# Altium PCB 42CAN.PcbDoc (part 1 of 2)
Units mm, origin at the board's own origin, x right, y up, seen from the top; angles counter-clockwise.
Board outline 42 x 42 mm, 4 copper layers (Top Layer 1 2, GND, Bottom Layer, POWER), stack 0.746 mm thick; 118 components, 90 nets, 420 pads, 193 vias.
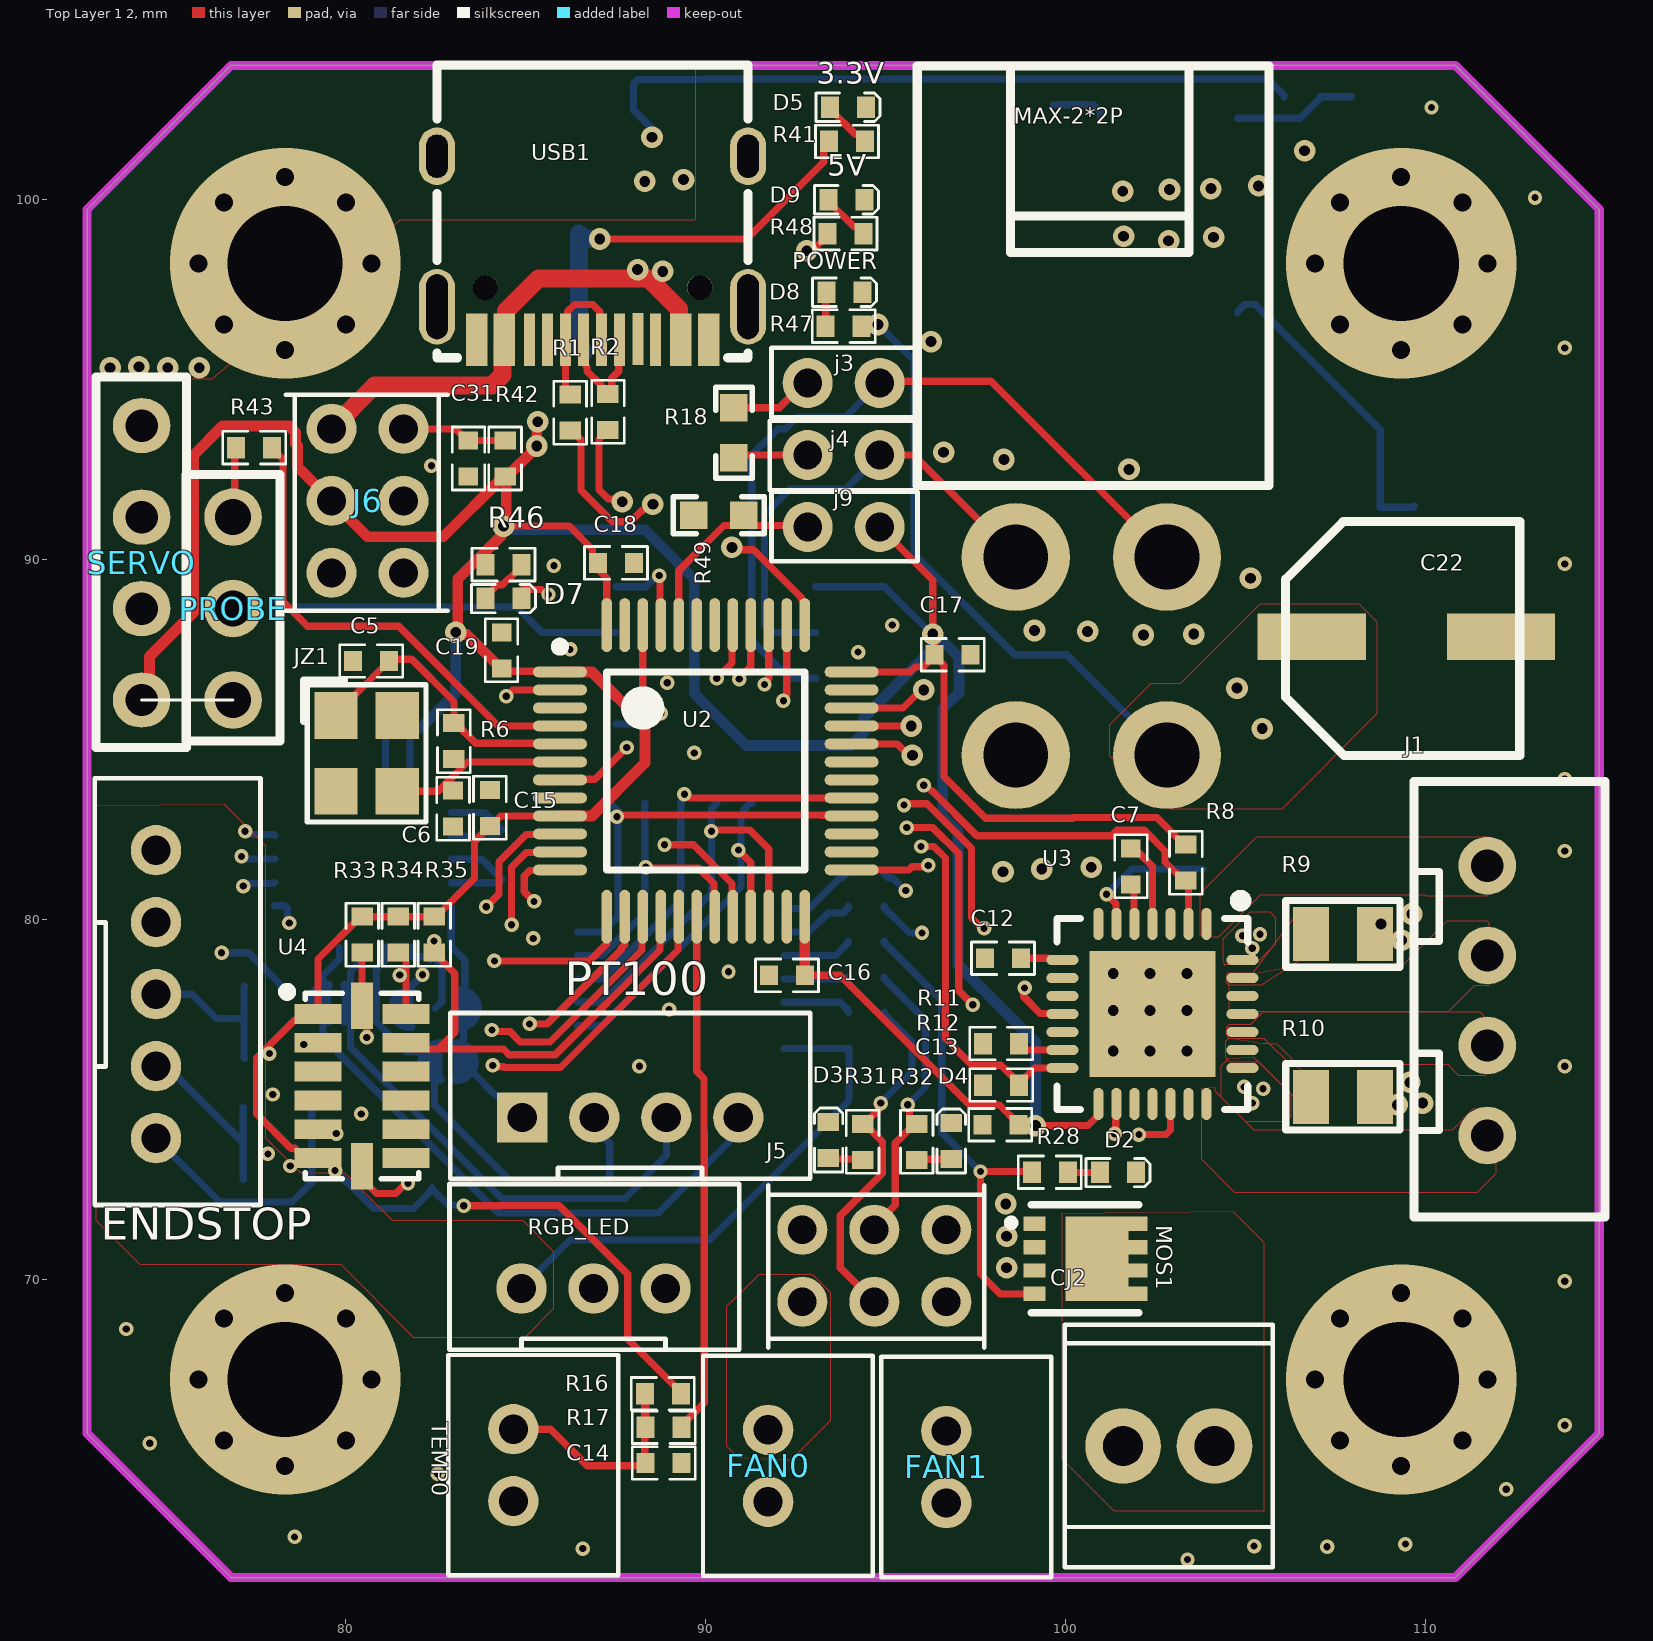
[diagram p0: Top Layer 1 2 view]
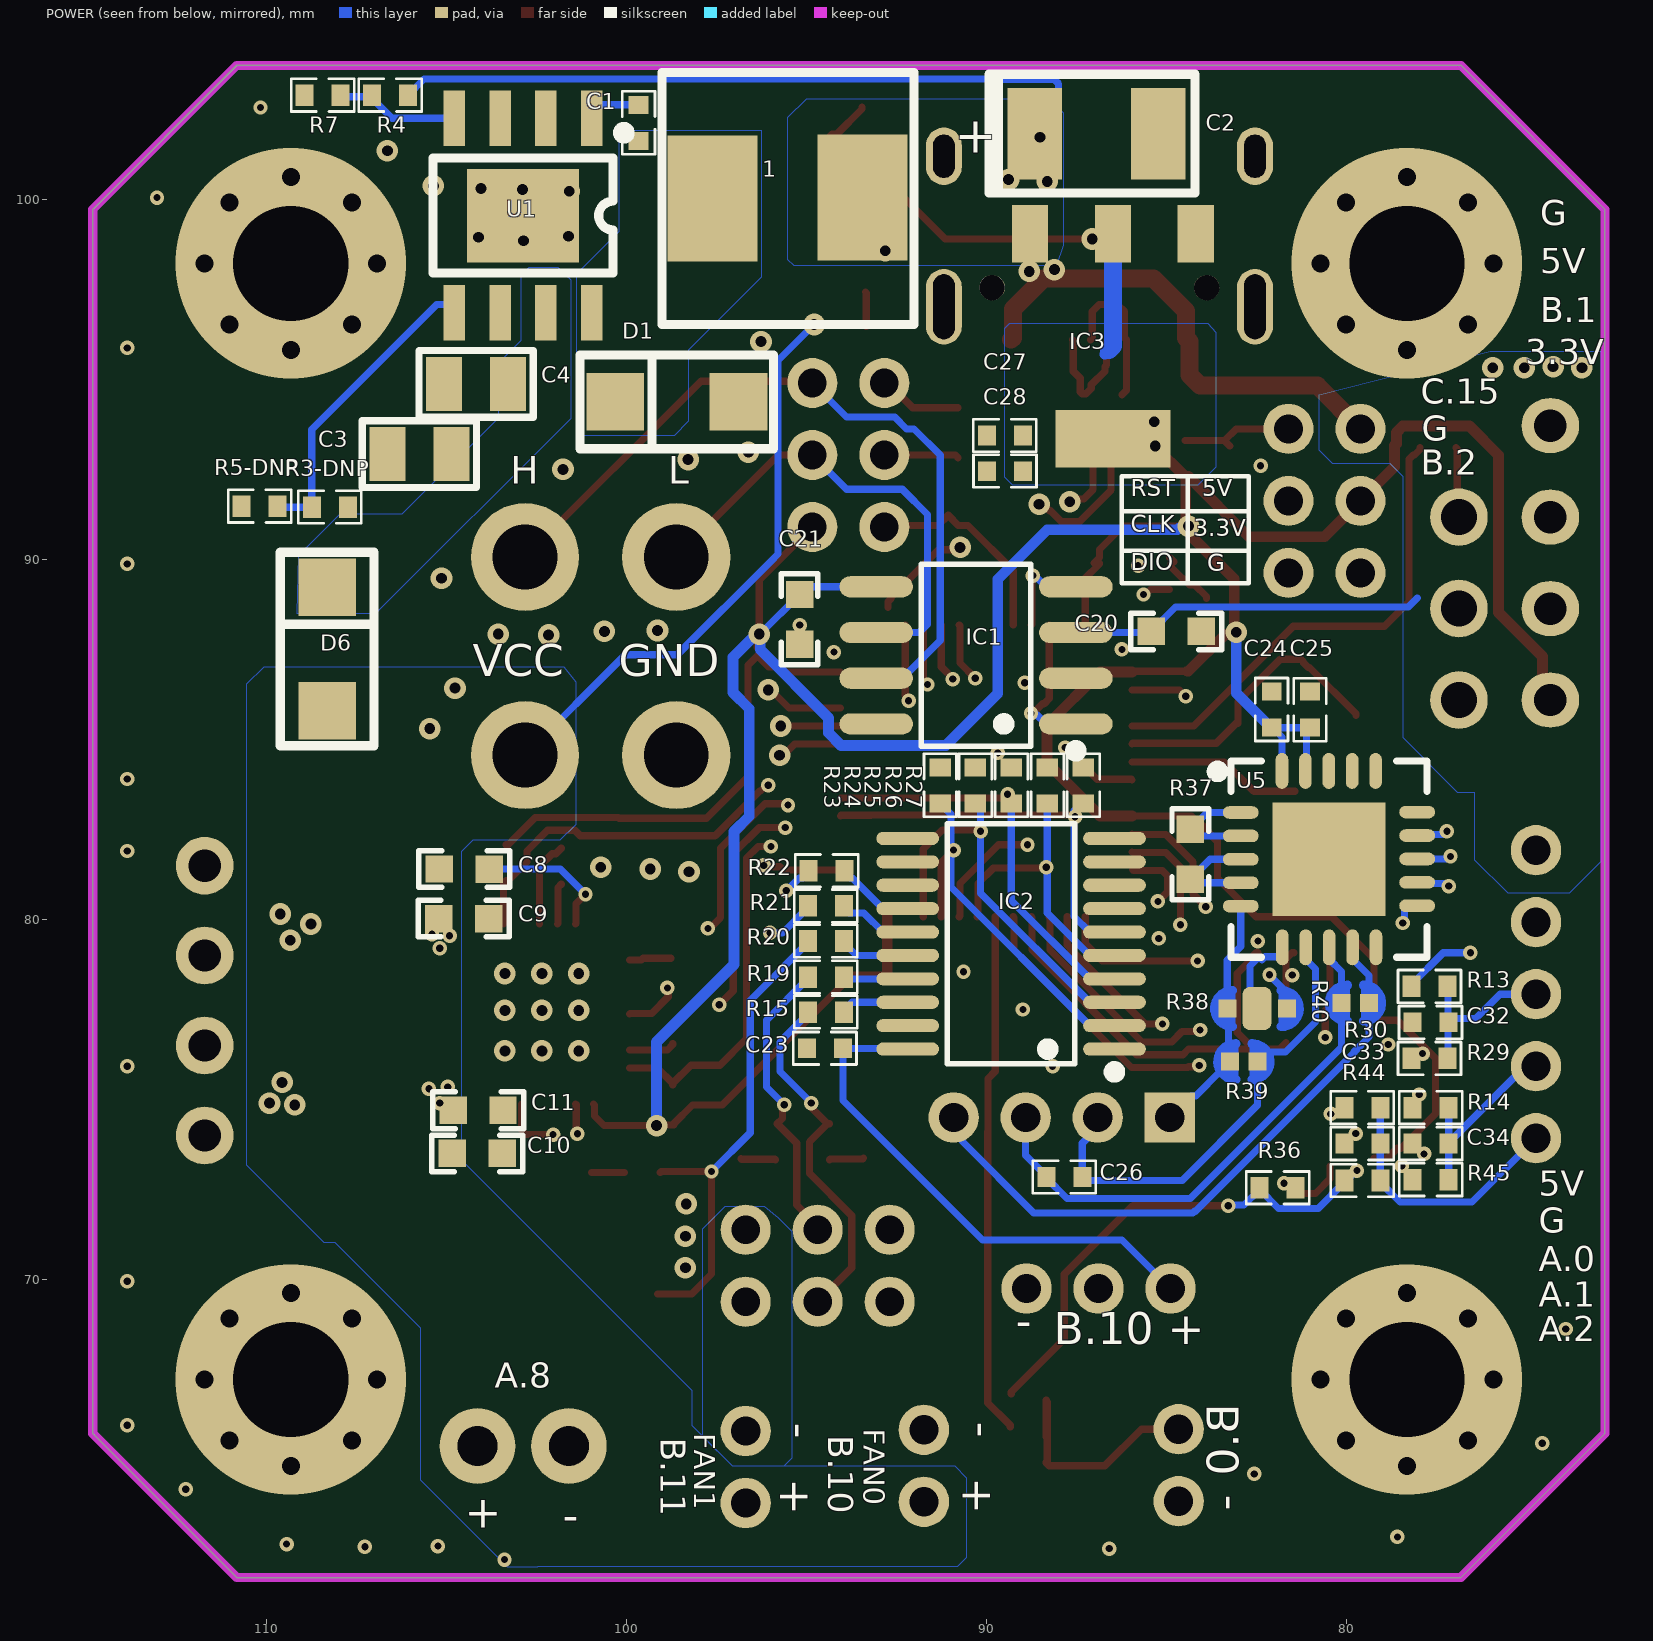
[diagram p1: POWER view, seen from below]
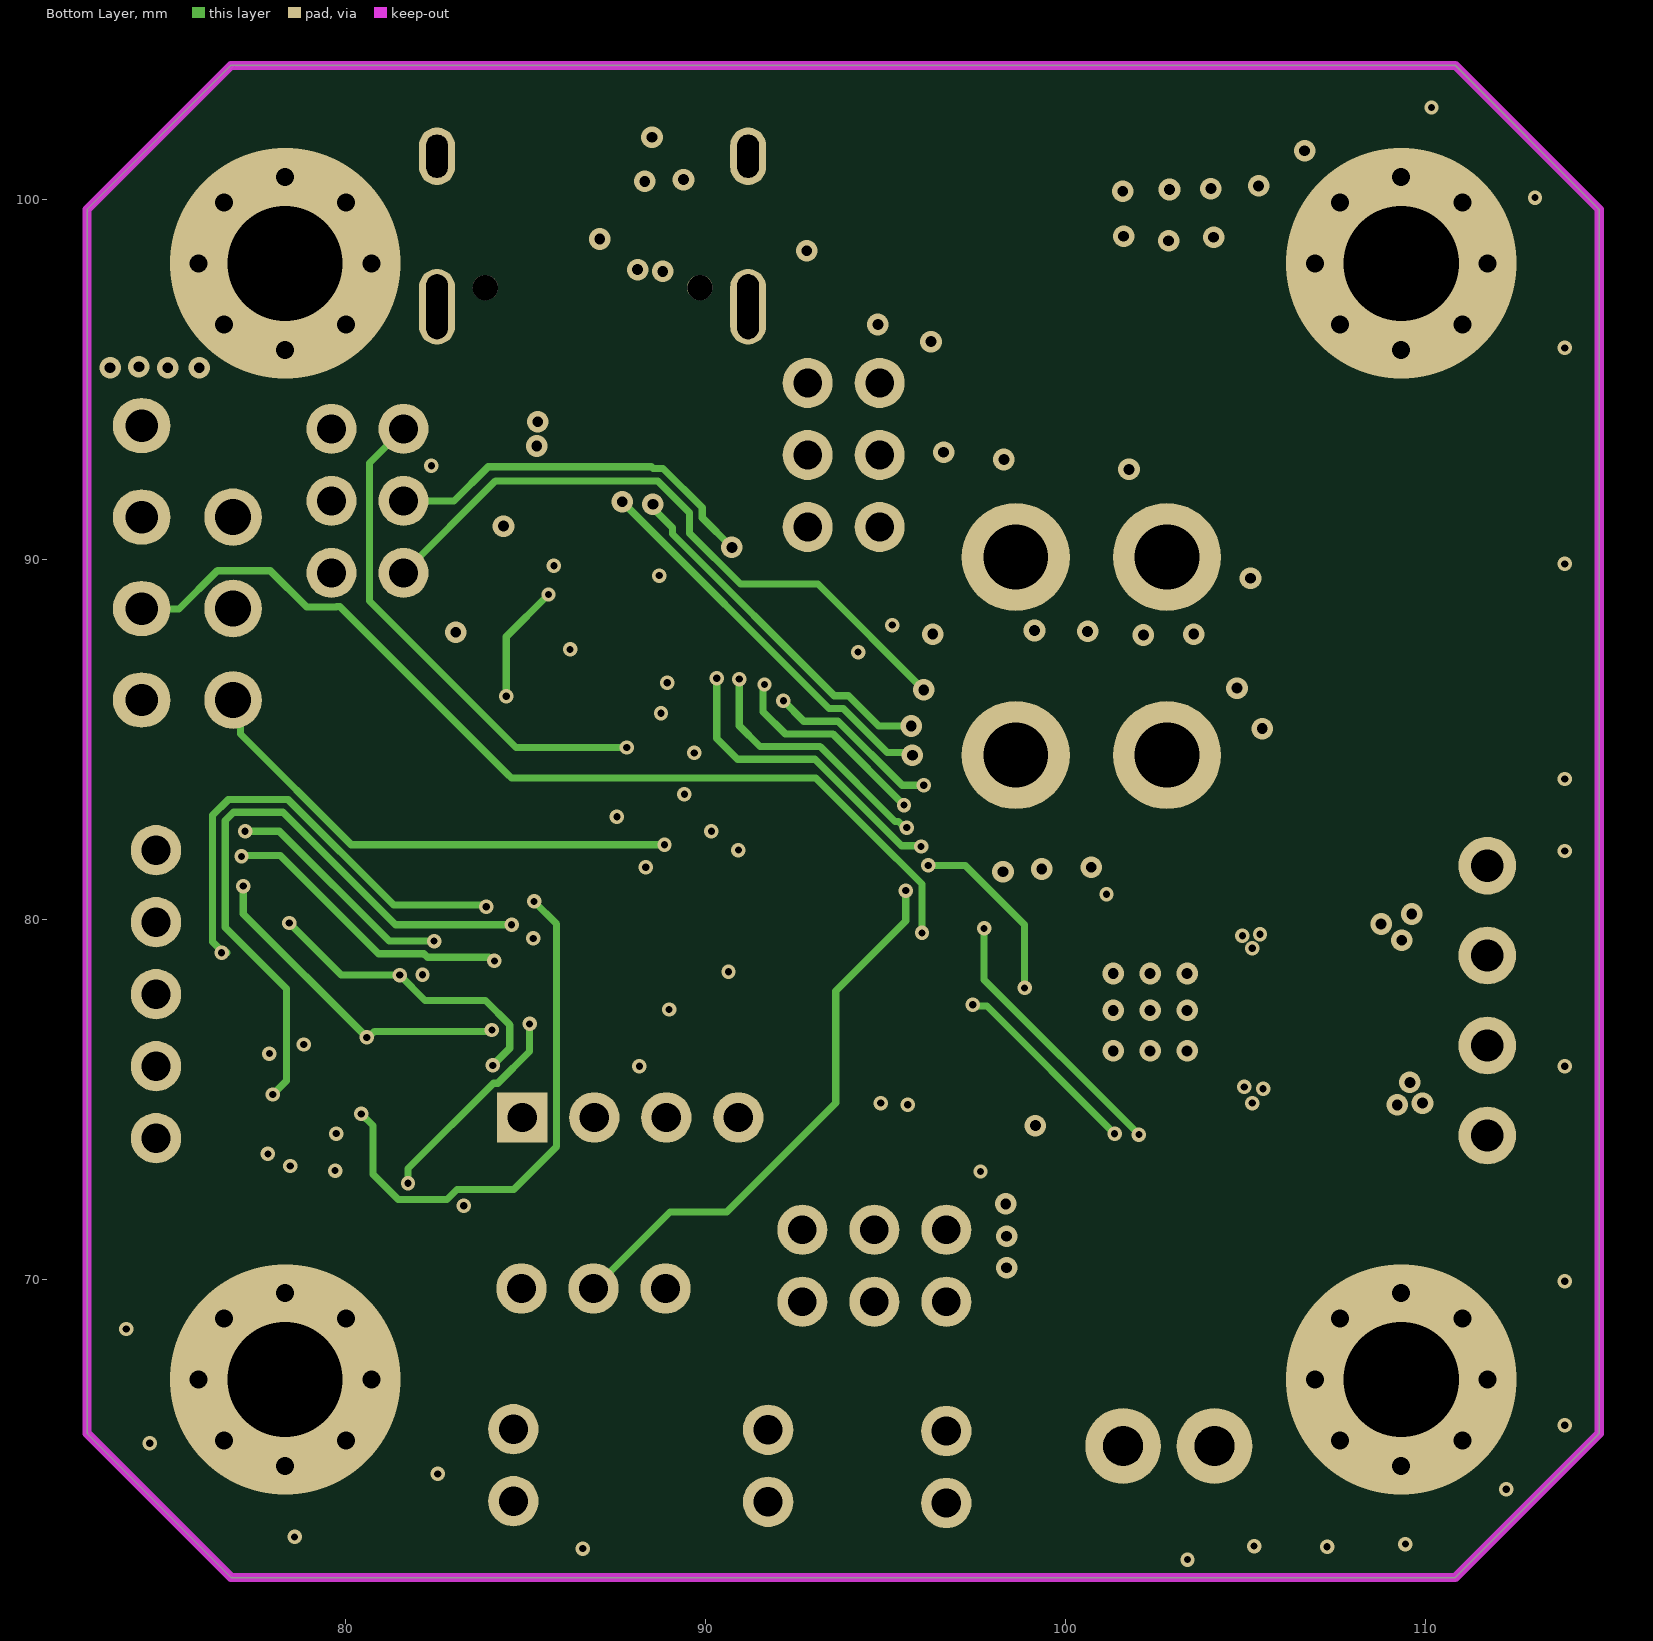
[diagram p2: Bottom Layer]

## Layer stack, top to bottom
Top Solder: solder mask 0.0102, Solder Resist, Dk 3.5
Top Layer 1 2: signal copper 0.035
Dielectric 4: prepreg 0.0711, PP-006, Dk 4.1
Dielectric 2: prepreg 0.0711, PP-006, Dk 4.1
GND: signal copper 0.0356
Dielectric 1: dielectric 0.32, FR-4, Dk 4.8
Bottom Layer: signal copper 0.0356
Dielectric 3: prepreg 0.0711, PP-006, Dk 4.1
Dielectric 5: prepreg 0.0711, PP-006, Dk 4.1
POWER: signal copper 0.035
Bottom Solder: solder mask 0.0102, Solder Resist, Dk 3.5

## Board outline
72.835,65.722 72.835,99.722 76.835,103.722 110.835,103.722 114.835,99.722 114.835,65.722 110.835,61.722 76.835,61.722

## Design rules (kind name [scope] priority, off if disabled: settings)
AssemblyTestPointUsage [All] p0: scope1count=1 scope1_0_kind=Board scope1_0_value=Board scope2count=1 scope2_0_kind=Board scope2_0_value=Board commentlength=0
AssemblyTestpoint [All] p0: scope1count=1 scope1_0_kind=Board scope1_0_value=Board scope2count=1 scope2_0_kind=Board scope2_0_value=Board commentlength=0
Clearance [All] p0: scope1count=1 scope1_0_kind=Board scope1_0_value=Board scope2count=1 scope2_0_kind=Board scope2_0_value=Board commentlength=0 gap=0.152
Clearance [All] p1: gap=0.152 ignorepadtopadclearanceinfootprint=TRUE
ComponentClearance [All] p0: scope1count=1 scope1_0_kind=Board scope1_0_value=Board scope2count=1 scope2_0_kind=Board scope2_0_value=Board commentlength=0 gap=0.254 collisioncheckmode=3
DiffPairsRouting [All] p0: scope1count=1 scope1_0_kind=Board scope1_0_value=Board scope2count=1 scope2_0_kind=Board scope2_0_value=Board commentlength=0
FabricationTestPointUsage [All] p0: scope1count=1 scope1_0_kind=Board scope1_0_value=Board scope2count=1 scope2_0_kind=Board scope2_0_value=Board commentlength=0 valid=0 allowmultiple=FALSE
FabricationTestpoint [All] p0: scope1count=1 scope1_0_kind=Board scope1_0_value=Board scope2count=1 scope2_0_kind=Board scope2_0_value=Board commentlength=0 side=3 testpointundercomponent=TRUE minsize=1.016 maxsize=2.54 preferedsize=1.524 minholesize=0 maxholesize=1.016 preferedholesize=0.813 testpointgrid=0.025
FanoutControl Fanout_BGA [All] p0 off: scope1count=1 scope1_0_kind=Board scope1_0_value=Board scope2count=1 scope2_0_kind=Board scope2_0_value=Board commentlength=69 // Protel DXP Scope 1 Expression Was: IsBGA   Fanout_BGA (Default Rule)
FanoutControl Fanout_LCC [All] p0 off: scope1count=1 scope1_0_kind=Board scope1_0_value=Board scope2count=1 scope2_0_kind=Board scope2_0_value=Board commentlength=69 // Protel DXP Scope 1 Expression Was: IsLCC   Fanout_LCC (Default Rule)
FanoutControl Fanout_SOIC [All] p0 off: scope1count=1 scope1_0_kind=Board scope1_0_value=Board scope2count=1 scope2_0_kind=Board scope2_0_value=Board commentlength=71 // Protel DXP Scope 1 Expression Was: IsSOIC   Fanout_SOIC (Default Rule)
FanoutControl Fanout_Small [All] p0 off: scope1count=1 scope1_0_kind=Board scope1_0_value=Board scope2count=1 scope2_0_kind=Board scope2_0_value=Board commentlength=84 // Protel DXP Scope 1 Expression Was: (CompPinCount < 5)   Fanout_Small (Default Rule)
FanoutControl Fanout_Default [All] p0: scope1count=1 scope1_0_kind=Board scope1_0_value=Board scope2count=1 scope2_0_kind=Board scope2_0_value=Board commentlength=30 // Fanout_Default (Default Rule)
Height [All] p0: scope1count=1 scope1_0_kind=Board scope1_0_value=Board scope2count=1 scope2_0_kind=Board scope2_0_value=Board commentlength=0
HoleSize [All] p0: scope1count=1 scope1_0_kind=Board scope1_0_value=Board scope2count=1 scope2_0_kind=Board scope2_0_value=Board commentlength=0 absolutevalues=TRUE maxlimit=2.54 minlimit=0.025 maxpercent=80.000 minpercent=20.000
HoleToHoleClearance [All] p0: scope1count=1 scope1_0_kind=Board scope1_0_value=Board scope2count=1 scope2_0_kind=Board scope2_0_value=Board commentlength=0
LayerPairs [All] p0: scope1count=1 scope1_0_kind=Board scope1_0_value=Board scope2count=1 scope2_0_kind=Board scope2_0_value=Board commentlength=0 enforce=TRUE
MinimumSolderMaskSliver [All] p0: scope1count=1 scope1_0_kind=Board scope1_0_value=Board scope2count=1 scope2_0_kind=Board scope2_0_value=Board commentlength=0
NetAntennae [All] p0: scope1count=1 scope1_0_kind=Board scope1_0_value=Board scope2count=1 scope2_0_kind=Board scope2_0_value=Board commentlength=0
PasteMaskExpansion [All] p0: scope1count=1 scope1_0_kind=Board scope1_0_value=Board scope2count=1 scope2_0_kind=Board scope2_0_value=Board commentlength=0 expansion=0
PlaneClearance [All] p0: scope1count=1 scope1_0_kind=Board scope1_0_value=Board scope2count=1 scope2_0_kind=Board scope2_0_value=Board commentlength=0 clearance=0.508
PlaneConnect [All] p0: scope1count=1 scope1_0_kind=Board scope1_0_value=Board scope2count=1 scope2_0_kind=Board scope2_0_value=Board commentlength=0 planeconnectstyle=Relief reliefexpansion=0.508 reliefentries=4 reliefconductorwidth=0.254 reliefairgap=0.254
PolygonConnect [All] p0: scope1count=1 scope1_0_kind=Board scope1_0_value=Board scope2count=1 scope2_0_kind=Board scope2_0_value=Board commentlength=0 connectstyle=Direct reliefconductorwidth=0.254 reliefentries=4 polygonreliefangle="90 Angle"
PolygonConnect [All] p1: connectstyle=Direct reliefconductorwidth=0.254 reliefentries=4 polygonreliefangle="90 Angle" airgapwidth=0.254
RoomDefinition 42CAN [All] p0: scope1count=1 scope1_0_kind=ComponentClass scope1_0_value=42CAN scope2count=1 scope2_0_kind=Board scope2_0_value=Board commentlength=0 region_x1=0 region_y1=0 region_x2=20000000 region_y2=10000000 confinementstyle=ConfineIn
RoomDefinition 42CAN [InComponentClass('42CAN')] p1: confinementstyle=ConfineIn formatcopy=TRUE lockcomponents=FALSE outline 0,0 50.8,0 50.8,25.4 0,25.4
RoutingCorners [All] p0: scope1count=1 scope1_0_kind=Board scope1_0_value=Board scope2count=1 scope2_0_kind=Board scope2_0_value=Board commentlength=0 cornerstyle=45-Degree minsetback=2.54 maxsetback=2.54
RoutingLayers [All] p0: scope1count=1 scope1_0_kind=Board scope1_0_value=Board scope2count=1 scope2_0_kind=Board scope2_0_value=Board commentlength=0 top layer=Automatic mid layer 1=Automatic mid layer 2=Automatic bottom layer=Automatic
RoutingPriority [All] p0: scope1count=1 scope1_0_kind=Board scope1_0_value=Board scope2count=1 scope2_0_kind=Board scope2_0_value=Board commentlength=0
RoutingTopology [All] p0: scope1count=1 scope1_0_kind=Board scope1_0_value=Board scope2count=1 scope2_0_kind=Board scope2_0_value=Board commentlength=0 topology=Shortest
RoutingVias [All] p0: scope1count=1 scope1_0_kind=Board scope1_0_value=Board scope2count=1 scope2_0_kind=Board scope2_0_value=Board commentlength=0 holewidth=0.711 width=1.27 viastyle="Through Hole" minholewidth=0.711 minwidth=1.27 maxholewidth=0.711 maxwidth=1.27
RoutingVias [All] p1: holewidth=0.711 width=1.27 viastyle="Through Hole" minholewidth=0.711 minwidth=1.27 maxholewidth=0.711 maxwidth=1.27
ShortCircuit [All] p0: scope1count=1 scope1_0_kind=Board scope1_0_value=Board scope2count=1 scope2_0_kind=Board scope2_0_value=Board commentlength=0 allowed=FALSE
SilkToBoardRegionClearance [All] p0: scope1count=1 scope1_0_kind=Board scope1_0_value=Board scope2count=1 scope2_0_kind=Board scope2_0_value=Board commentlength=0
SilkToSilkClearance [All] p0: scope1count=1 scope1_0_kind=Board scope1_0_value=Board scope2count=1 scope2_0_kind=Board scope2_0_value=Board commentlength=0
SilkToSolderMaskClearance [All] p0 off: scope1count=1 scope1_0_kind=Board scope1_0_value=Board scope2count=1 scope2_0_kind=Board scope2_0_value=Board commentlength=44 // Protel DXP Scope 1 Expression Was: IsPad
SolderMaskExpansion [All] p0: scope1count=1 scope1_0_kind=Board scope1_0_value=Board scope2count=1 scope2_0_kind=Board scope2_0_value=Board commentlength=0 expansion=0.102
SolderMaskExpansion [All] p1: expansion=0.102 istentingtop=FALSE
UnRoutedNet [All] p0: scope1count=1 scope1_0_kind=Board scope1_0_value=Board scope2count=1 scope2_0_kind=Board scope2_0_value=Board commentlength=0
UnpouredPolygon [All] p0: scope1count=1 scope1_0_kind=Board scope1_0_value=Board scope2count=1 scope2_0_kind=Board scope2_0_value=Board commentlength=0
Width [All] p0: scope1count=1 scope1_0_kind=Board scope1_0_value=Board scope2count=1 scope2_0_kind=Board scope2_0_value=Board commentlength=0 maxlimit=2.54 minlimit=0.102 preferedwidth=0.2
Width [All] p1: maxlimit=2.54 minlimit=0.102 preferedwidth=0.2
30 further rules are at their usual default settings.

## Components (designator, comment, footprint, x,y, rotation, side; value= is the part's Value field where it differs from the comment)
1 "22UH" 7*7电感 92.25,103.525 r0 bottom locked
C1 "0.01UF" C0402 99.675,102.125 r90 bottom
C2 "220UF" 3528B 87.95,101.825 r180 bottom
C3 "4.7UF/50V" C0805 105.65,92.925 r0 bottom
C4 "4.7UF/50V" C0805 104.075,94.875 r0 bottom
C5 "22PF" C0402 80.725,87.175 r180 top
C6 "22PF" C0402 83,83.075 r90 top
C7 "22NF" C0402 101.825,81.475 r90 top
C8 "0.1UF/50V" 0603 103.225,81.954 r0 bottom
C9 "0.1UF/50V" 0603C 105.825,79.471 r180 bottom
C10 "0.1UF/50V" 0603C 105.45,72.949 r180 bottom
C11 "1UF/100V" 0603 102.841,75.252 r0 bottom
C12 "2.2uf" C0402 98.275,78.925 r0 top
C13 "0.1UF" C0402 98.2,74.3 r0 top
C14 "10UF" C0402 88.85,64.9 r180 top
C15 "0.1UF" C0402 84.025,83.1 r270 top
C16 "0.1UF" C0402 92.275,78.45 r0 top
C17 "0.1UF" C0402 96.875,87.35 r180 top
C18 "0.1UF" C0402 87.525,89.9 r180 top
C19 "0.1UF" C0402 84.35,87.475 r270 top
C20 "0.1UF" 0603C 86.034,87.448 r180 bottom
C21 "0.1UF" 0603C 95.754,89.625 r270 bottom
C22 "100UF/35V" 6.3*7.7电解电容 109.425,87.75 r90 top
C23 "0.1UF" C0402 94.5,76.425 r180 bottom
C24 "0.1UF" C0402 82.089,85.829 r270 bottom
C25 "0.1UF" C0402 81.025,85.825 r270 bottom
C26 "0.1UF" C0402 87.85,72.85 r180 bottom
C27 "0.1UF" C0402 89.503,93.438 r0 bottom
C28 "10UF" C0402 89.5,92.45 r0 bottom
C31 "0.1UF" C0402 83.425,92.8 r90 top
C32 "10UF" C0402 77.682,77.146 r180 bottom
C33 "10UF" C0402 79.575,73.775 r180 bottom
C34 "10UF" C0402 77.675,73.775 r180 bottom
CJ2 "KF2.54-2P" KF2.54-2P -109.15,203.625 r0 top
D1 "SS34" SMA 92.75,97.15 r0 bottom
D2 "LED 蓝色" 0402LED 101.472,72.983 r0 top
D3 "LED 蓝色" 0402LED 93.417,73.872 r90 top
D4 "LED 蓝色" 0402LED 96.825,73.85 r90 top
D5 "LED 蓝色" 0402led 93.966,102.568 r0 top
D6 "SS34" SMA 105.55,81.65 r90 bottom
D7 "LED 蓝色" 0402led 84.4,88.925 r0 top
D8 "LED 蓝色" 0402led 93.872,97.433 r0 top
D9 "LED 蓝色" 0402led 93.925,100 r0 top
ENDSTOP "PH2.0-5P" PH2.0-5P 72.769,82.687 r270 top
FAN0 "PH2.0-2P" PH2.0-2P 91.774,64.982 r270 top
FAN1 "PH2.0-2P" PH2.0-2P 96.725,64.95 r270 top
IC1 "MCP2542" SOIC-8 90.302,87.335 r90 bottom
IC2 "74HC541" TSSOP-20 86.452,75.78 r90 bottom
IC3 "AMS1117-3.3V" AMS1117 85.2,93.65 r0 bottom
J1 "XH2.54-4" XH2.54-4 109.693,71.46 r90 top
j3 "2.0-1*2" "2.0MM-1*2P -插针" 94.012,95.078 r180 top
j4 "2.0-1*2" "2.0MM-1*2P -插针" 93.688,92.722 r0 top
J5 "2*3排母-2.0-镀金" "2.0MM-2*3P 排母" 92.475,71.506 r270 top
J6 "2*3排母-2.0-镀金" "2.0MM-2*3P -插针" 81.75,93.85 r180 top
j9 "2.0-1*2" "2.0MM-1*2P -插针" 94.012,91.078 r180 top
JZ1 "8M" OSC-3225-4P 80.6,84.6 r270 top
MAX-2*2P "2*4P-2.54排针_1" MX4.2-2*2P 101.025,95.25 r180 top locked
MOS1 "HSBB6115" PRPAK3*3 98.664,71.851 r270 top
PROBE "3P" 3P 75.79,82.555 r0 top
PT100 "PH2.0-4P" PH2.0-4P 84.163,72.519 r0 top
R1 "22R" R0402 86.25,94.075 r90 top
R2 "22R" R0402 87.3,94.1 r90 top
R3-DNP "10K" R0402 108.25,91.45 r0 bottom
R4 "10K" R0402 106.575,102.89 r0 bottom
R5-DNP "3K" R0402 110.2,91.475 r0 bottom
R6 "1M" R0402 83.025,84.95 r270 top
R7 "3.24K" R0402 108.45,102.89 r0 bottom
R8 "20k" R0402 103.35,81.575 r90 top
R9 "0R11" 0805 107.6,79.6 r0 top
R10 "0R11" 0805 107.6,75.075 r0 top
R11 "20k" R0402 98.225,76.55 r180 top
R12 "20k" R0402 98.225,75.4 r180 top
R13 "1K" R0402 77.707,78.146 r180 bottom
R14 "1K" R0402 77.675,74.775 r180 bottom
R15 "1K" R0402 94.475,77.425 r0 bottom
R16 "2.2K 0.1%低温漂" R0402 88.825,66.825 r180 top
R17 "1K" R0402 88.85,65.9 r0 top
R18 "120R 0.1%" 0603 91.354,92.225 r90 top
R19 "1K" R0402 94.475,78.4 r0 bottom
R20 "1K" R0402 94.475,79.4 r0 bottom
R21 "1K" R0402 94.475,80.375 r0 bottom
R22 "22R" R0402 94.45,81.35 r0 bottom
R23 "10K" R0402 91.3,83.725 r90 bottom
R24 "10K" R0402 90.325,83.725 r90 bottom
R25 "10K" R0402 89.325,83.725 r90 bottom
R26 "10K" R0402 88.325,83.725 r90 bottom
R27 "10K" R0402 87.325,83.725 r90 bottom
R28 "1K" R0402 99.575,72.975 r180 top
R29 "2.2K" R0402 77.707,76.146 r180 bottom
R30 "1K" R0402 79.575,74.775 r180 bottom
R31 "1K" R0402 94.375,73.825 r90 top
R32 "1K" R0402 95.875,73.825 r90 top
R33 "4.7K" R0402 80.475,79.575 r90 top
R34 "4.7K" R0402 81.475,79.575 r90 top
R35 "4.7K" R0402 82.475,79.575 r90 top
R36 "10K" R0402 81.925,72.55 r180 bottom
R37 "400R" 0603 84.904,83.1 r270 bottom
R38 "mode" switch2 81.35,78.05 r0 bottom
R39 "switch" switch#1 87.289,75.35 r180 bottom
R40 "switch" switch#2 84.189,76.975 r180 bottom
R41 "1K" R0402 93.944,101.61 r0 top
R42 "10K" R0402 84.45,92.8 r270 top
R43 "1K" R0402 77.475,93.1 r180 top
R44 "2.2K" R0402 79.575,72.75 r180 bottom
R45 "2.2K" R0402 77.675,72.775 r180 bottom
R46 "1K" R0402 84.4,89.85 r180 top
R47 "4.7K" R0402 93.85,96.475 r180 top
R48 "1K" R0402 93.9,99.05 r0 top
R49 "10K" 0603 91.675,91.779 r180 top
RGB_LED "PH2.0-3P" PH2.0-3P 86.856,69.725 r0 top
SERVO "4P" 4P 74.35,86.095 r0 top
TEMP0 "PH2.0-2P" PH2.0-2P 84.7,65 r270 top
U1 "TPS5430" TPS5430 102.722,99.602 r0 bottom
U2 "stm32c8t/stm32f072c8" LQFP-48 84.769,79.003 r0 top
U3 "TMC2209-LA" TMC2209 102.425,77.375 r0 top
U4 "ADXL345BCCZ" ADXL345 80.431,75.513 r270 top
U5 "MAX31865" QFN20 83.645,84.115 r270 bottom
USB1 "TYPEC-304-BCP16" USB-C-SMD_TYPEC-304-BCP16 86.875,98.65 r180 top

## Footprints (in the part's own frame and the unit in brackets; to place one, negate y for a bottom-side part, rotate by r counter-clockwise, add the part's x,y. Pads: shape width x height; smd on the part's side, far side on the other; paste and mask are expansions set on the pad)
"2.0MM-1*2P -插针" [mm]
  round 1.39 hole 0.8: 1(-0.838,0.178) 2(1.162,0.178)
  silkscreen extent -1.89,-0.8 2.17,1.13
"2.0MM-2*3P -插针" [mm]
  round 1.39 hole 0.8: 1(0.125,4.225) 2(0.125,2.225) 3(0.125,0.225) 4(2.125,0.225) 5(2.125,2.225) 6(2.125,4.225)
  silkscreen extent -1.1,-0.72 3.4,5.28
"2.0MM-2*3P 排母" [mm]
  round 1.39 hole 0.8: 1(0.125,4.225) 2(0.125,2.225) 3(0.125,0.225) 4(2.125,0.225) 5(2.125,2.225) 6(2.125,4.225)
  silkscreen extent -1.1,-0.72 3.4,5.28
3P [mm]
  round 1.6 hole 1: 1(1.1,8.62) 2(1.1,6.08) 3(1.1,3.54)
  silkscreen extent -0.2,2.4 2.4,9.8
4P [mm]
  oval 1.6x1.524 hole 0.9: 1(0,7.62) 2(0,5.08) 3(0,2.54) 4(0,0)
  silkscreen extent -1.27,-1.32 1.24,8.97
6.3*7.7电解电容 [mm]
  rect 1.3x3 smd: 1(0.1,2.575) 2(0.1,-2.675)
  silkscreen extent -3.2,-3.2 3.3,3.3
7*7电感 [mm]
  rect 2.5x3.5 smd: 1(1.2,3.475) 2(5.375,3.5)
  silkscreen extent -0.23,0 6.78,7
0402LED [mm]
  rect 0.5x0.6 smd: 1(-0.497,-0.008) 2(0.503,-0.008)
  silkscreen extent -0.89,-0.41 0.89,0.38
0402led [mm]
  rect 0.5x0.6 smd: 1(-0.497,-0.008) 2(0.503,-0.008)
  silkscreen extent -0.89,-0.41 0.89,0.38
0603 [mil]
  rect 30x30 smd: 1(23.62,21.81) 2(78.12,21.75)
  silkscreen extent 1,2 101,42
0603C [mil]
  rect 30x30 smd: 1(23.62,21.81) 2(78.12,21.75)
  silkscreen extent 1,2 101,42
0805 [mm]
  rect 1x1.5 smd: 1(-0.775,0) 2(1,0)
  silkscreen extent -1.48,-0.92 1.7,0.92
3528B [mil]
  rect 60x100 smd: 1(-28.36,0) 2(106.64,0)
  silkscreen extent -78,-65 147,65
ADXL345 [mm]
  rect 0.55x1.3 smd: 1(-1.862,-1.181) 2(-1.062,-1.181) 3(-0.263,-1.181) 4(0.538,-1.181) 5(1.337,-1.181) 6(2.137,-1.181) 8(2.137,1.259) 9(1.337,1.259) 10(0.538,1.259) 11(-0.263,1.259) 12(-1.062,1.259) 13(-1.862,1.259)
  rect 1.3x0.6 smd: 7(2.368,0.039) 14(-2.093,0.039)
  silkscreen extent -2.6,-2.16 2.71,1.62
AMS1117 [mm]
  rect 1x1.6 smd: 1(-1,-5.4) 2(1.3,-5.4) 3(3.6,-5.4)
  rect 3.2x1.6 smd: 4(1.3,0.3)
C0402 [mm]
  rect 0.5x0.55 smd: 1(0.5,0) 2(-0.5,0)
  silkscreen extent -0.87,-0.46 0.87,0.45
C0805 [mm]
  rect 1x1.5 smd: 1(-0.775,0) 2(1,0)
  silkscreen extent -1.48,-0.92 1.7,0.92
KF2.54-2P [mm]
  round 2.1 hole 1.1 slot 1.1 at 0 deg: 1(213.3,-138.25) 2(210.76,-138.25)
  silkscreen extent 209.14,-141.62 214.92,-134.88
LQFP-48 [mm]
  oval 1.5x0.3 smd: 1(1.2,7.872) 2(1.2,7.372) 3(1.2,6.872) 4(1.2,6.372) 5(1.2,5.872) 6(1.2,5.372) 7(1.2,4.872) 8(1.2,4.372) 9(1.2,3.872) 10(1.2,3.372) 11(1.2,2.872) 12(1.2,2.372) 25(9.3,2.372) 26(9.3,2.872) 27(9.3,3.372) 28(9.3,3.872) 29(9.3,4.372) 30(9.3,4.872) 31(9.3,5.372) 32(9.3,5.872) 33(9.3,6.372) 34(9.3,6.872) 35(9.3,7.372) 36(9.3,7.872)
  oval 0.3x1.5 smd: 13(2.5,1.072) 14(3,1.072) 15(3.5,1.072) 16(4,1.072) 17(4.5,1.072) 18(5,1.072) 19(5.5,1.072) 20(6,1.072) 21(6.5,1.072) 22(7,1.072) 23(7.5,1.072) 24(8,1.072) 37(8,9.172) 38(7.5,9.172) 39(7,9.172) 40(6.5,9.172) 41(6,9.172) 42(5.5,9.172) 43(5,9.172) 44(4.5,9.172) 45(4,9.172) 46(3.5,9.172) 47(3,9.172) 48(2.5,9.172)
  silkscreen extent 1.08,2.37 8,8.7
MX4.2-2*2P [mm]
  round 3 hole 1.8: 1(-1.804,5.185) 2(2.396,5.185) 3(2.396,10.685) 4(-1.804,10.685)
  silkscreen extent -4.64,-8.45 5.13,3.2
OSC-3225-4P [mm]
  rect 1.3x1.2 smd: 1(-1.061,-0.852) 2(1.039,-0.852) 3(1.039,0.848) 4(-1.061,0.848)
  silkscreen extent -2.04,-1.75 1.89,1.65
PH2.0-2P [mm]
  round 1.4 hole 0.813: 1(-0.843,-0.024) 2(1.157,-0.024)
  silkscreen extent -2.9,-1.83 3.22,2.89
PH2.0-3P [mil]
  round 55.12 hole 32: 1(-77,1) 2(1.74,1) 3(80.48,1)
  silkscreen extent -156,-66 161,115
PH2.0-4P [mil]
  rect 55.12x55.12 hole 32: 1(30,78)
  round 55.12 hole 32: 2(108.74,78) 3(187.48,78) 4(266.22,78)
  silkscreen extent -49,11 345,192
PH2.0-5P [mil]
  round 55.12 hole 32: 1(30,78) 2(108.74,78) 3(187.48,78) 4(266.22,78) 5(344.96,78)
  silkscreen extent -49,11 418,192
PRPAK3*3 [mm]
  rect 0.4x0.6 smd: 1(0.301,0.486) 2(0.951,0.486) 3(1.601,0.486) 4(2.251,0.486) 5(0.3,3.325) 5(0.95,3.325) 5(1.6,3.325) 5(2.25,3.325)
  rect 2.35x1.75 smd: 5(1.276,2.22)
  silkscreen extent -0.22,-0.27 2.78,3.39
QFN20 [mm]
  oval 0.35x0.996 smd: 1(1.145,0.695) 2(1.795,0.695) 3(2.445,0.695) 4(3.096,0.695) 5(3.746,0.695) 11(3.736,5.595) 12(3.085,5.595) 13(2.435,5.595) 14(1.785,5.595) 15(1.135,5.595)
  oval 0.996x0.35 smd: 6(4.89,1.849) 7(4.89,2.5) 8(4.89,3.15) 9(4.89,3.8) 10(4.89,4.45) 16(-0.01,4.44) 17(-0.01,3.79) 18(-0.01,3.14) 19(-0.01,2.489) 20(-0.01,1.839)
  rect 3.15x3.15 smd: 21(2.44,3.145)
  silkscreen extent -0.28,-0.1 5.17,5.87
R0402 [mm]
  rect 0.5x0.6 smd: 1(0.5,0) 2(-0.5,0)
  silkscreen extent -0.87,-0.46 0.87,0.45
SMA [mm]
  rect 1.6x1.6 smd: 1(4.15,2.775) 2(7.575,2.775)
  silkscreen extent 3.17,1.47 8.55,4.08
SOIC-8 [mm]
  oval 0.588x2.043 smd: 1(-1.905,-2.773) 2(-0.635,-2.773) 3(0.635,-2.773) 4(1.905,-2.773) 5(1.905,2.773) 6(0.635,2.773) 7(-0.635,2.773) 8(-1.905,2.773)
  silkscreen extent -2.8,-2.92 2.53,1.52
switch#1 [mm]
  rect 0.5x0.5 smd mask+0: 1(4.039,0.7) 2(4.8,0.7)
  Top Layer 1 2 region: 5.05,0.3 4.575,0.3 4.575,1.15 5.05,1.15
  Top Layer 1 2 region: 3.8,1.1 4.275,1.1 4.275,0.25 3.8,0.25
  Top Layer 1 2 lines w0.254: 4.65,0.201 ccw(c4.65,0.7) 4.8,0.224 ccw(c4.65,0.7) 5.07,0.97 ccw(c4.65,0.7) 4.977,1.077 ccw(c4.65,0.7) 4.65,1.199 ; 4.2,0.201 cw(c4.2,0.7) 3.776,0.437 cw(c4.2,0.7) 3.995,1.155 cw(c4.2,0.7) 4.2,1.199
switch#2 [mm]
  rect 0.5x0.5 smd mask+0: 1(4.039,0.7) 2(4.8,0.7)
  Top Layer 1 2 region: 3.8,1.1 4.275,1.1 4.275,0.25 3.8,0.25
  Top Layer 1 2 region: 5.05,0.3 4.575,0.3 4.575,1.15 5.05,1.15
  Top Layer 1 2 lines w0.254: 4.65,0.201 ccw(c4.65,0.7) 4.8,0.224 ccw(c4.65,0.7) 4.8,1.176 ccw(c4.65,0.7) 4.709,1.195 ccw(c4.65,0.7) 4.65,1.199 ; 4.2,0.201 cw(c4.2,0.7) 4.039,0.228 cw(c4.2,0.7) 3.701,0.701 cw(c4.2,0.7) 4.034,1.171 cw(c4.2,0.7) 4.039,1.172 cw(c4.2,0.7) 4.2,1.199
switch2 [mm]
  rect 0.5x0.5 smd mask+0: 1(0.314,0.525) 3(1.975,0.525)
  rrect50% 0.8x1.2 smd: 2(1.15,0.525)
  Top Layer 1 2 region: 0.075,0.925 0.55,0.925 0.55,0.075 0.075,0.075
  Top Layer 1 2 region: 2.225,0.125 1.75,0.125 1.75,0.975 2.225,0.975
  Top Layer 1 2 lines w0.254: 0.475,1.024 ccw(c0.475,0.525) 0.45,0.027 ccw(c0.475,0.525) 0.475,0.026 ; 1.825,1.024 cw(c1.825,0.525) 1.944,1.01 cw(c1.825,0.525) 1.975,0.049 cw(c1.825,0.525) 1.825,0.026
TMC2209 [mm]
  oval 0.28x0.896 smd: 1(1.501,2.5) 2(1.001,2.5) 3(0.501,2.5) 4(0,2.5) 5(-0.5,2.5) 6(-1.001,2.5) 7(-1.501,2.5) 15(-1.501,-2.5) 16(-1.001,-2.5) 17(-0.5,-2.5) 18(0,-2.5) 19(0.501,-2.5) 20(1.001,-2.5) 21(1.501,-2.5)
  oval 0.896x0.28 smd: 8(-2.5,1.501) 9(-2.5,1.001) 10(-2.5,0.5) 11(-2.5,0) 12(-2.5,-0.5) 13(-2.5,-1.001) 14(-2.5,-1.501) 22(2.5,-1.501) 23(2.5,-1.001) 24(2.5,-0.5) 25(2.5,0) 26(2.5,0.5) 27(2.5,1.001) 28(2.5,1.501)
  rect 3.5x3.5 smd: 29(0,0)
  silkscreen extent -2.65,-2.65 2.65,3.3
TPS5430 [mm]
  rect 0.6x1.55 smd: 1(-1.742,-2.648) 2(-0.472,-2.648) 3(0.798,-2.648) 4(2.068,-2.648) 5(2.068,2.752) 6(0.798,2.752) 7(-0.472,2.752) 8(-1.742,2.752)
  rect 3.1x2.6 smd: 9(0.163,0.052)
  silkscreen extent -2.79,-2.4 2.66,1.65
TSSOP-20 [mm]
  oval 0.364x1.742 smd: 1(0.62,0.006) 2(1.27,0.006) 3(1.92,0.006) 4(2.57,0.006) 5(3.22,0.006) 6(3.87,0.006) 7(4.52,0.006) 8(5.17,0.006) 9(5.82,0.006) 10(6.47,0.006) 11(6.47,5.748) 12(5.82,5.748) 13(5.17,5.748) 14(4.52,5.748) 15(3.87,5.748) 16(3.22,5.748) 17(2.57,5.748) 18(1.92,5.748) 19(1.27,5.748) 20(0.62,5.748)
  silkscreen extent -0.16,-0.14 6.87,4.65
USB-C-SMD_TYPEC-304-BCP16 [mm]
  oval 1x2.099 hole 0.6 slot 1.8 at 90 deg: 13(-4.32,1.633) 14(4.32,1.633)
  oval 1x1.599 hole 0.6 slot 1.2 at 90 deg: 15(-4.32,-2.547) 16(4.32,-2.547)
  rect 0.6x1.45 smd: A1B12(-3.225,2.547) A4B9(-2.45,2.547) B1A12(3.22,2.547) B4A9(2.45,2.547)
  rect 0.3x1.45 smd: A5(-1.26,2.532) A6(-0.25,2.547) A7(0.25,2.547) A8(1.25,2.547) B5(1.75,2.547) B6(0.75,2.547) B7(-0.75,2.547) B8(-1.75,2.547)
  round 0.7 hole 0.7 unplated: ""(-2.98,1.102) ""(2.98,1.102)
  silkscreen extent -4.32,-5.08 4.32,3.05
XH2.54-4 [mm]
  round 1.6 hole 0.9: 1(2.54,-2.032) 2(5.04,-2.032) 3(7.54,-2.032) 4(10.033,-2.032)
  silkscreen extent 0.28,-5.3 12.37,0

## Part data
1: library part 电感
C1 C3 C4 C5 C6 C9 C10 C14 C15 C16 C17 C18 C19 C23 C24 C25 C26 C27 C28 C31 C32 C33 C34: library part C
C2: library part 钽电容, "328B"
C7 C8 C12 C13: library part 104
C11: library part 1uf
C20 C21: library part 0603C
C22: library part 电机电容
D2 D3 D4 D5 D7 D8 D9: library part "LED 贴片"
IC3: library part AMS1117
J5 J6: library part 2*3P
JZ1: library part JZ3225
MOS1: library part DFN5060
R1 R2 R3-DNP R4 R5-DNP R6 R7 R13 R14 R15 R16 R17 R19 R20 R21 R22 R23 R24 R25 R26 R27 R28 R29 R30 R31 R32 R33 R34 R35 R36 R41 R42 R43 R44 R45 R46 R47 R48 R49: library part R
R18 R37: library part 0603R
U2: library part stm32F103C8T6/F072C8T6

## Via types
v1: diameter 0.4, hole 0.2, Top Layer 1 2 to POWER, tented both sides, 91 vias
v2: diameter 0.6, hole 0.3, Top Layer 1 2 to POWER, tented both sides, 64 vias
v3: diameter 0.8, hole 0.5, Top Layer 1 2 to POWER, 32 vias
v4: diameter 6.4, hole 3.2, Top Layer 1 2 to POWER, 4 vias
v5: diameter 0.406, hole 0.203, Top Layer 1 2 to POWER, tented both sides, 2 vias

## Nets (pads, with @x,y where several pads share a name; then routed paths per layer and width w, separated by ;. In a path a pad name is that pad's centre, name@x,y a point inside that pad or via, vN(x,y) a via of type N, cw(c..) or ccw(c..) an arc to the next point about the centre after c; other vN are vias at no path point)
+3.3V: C13.1 C15.1 C16.1 C17.1 C18.1 C19.1 C21.1 C24.1 C25.1 C27.2 C28.2 IC1.5 IC3.2 IC3.4 J6.5 j9.1 R8.1 R16.2 R29.2 R33.1 R34.1 R35.1 R36.2 R41.2 R42.1 R44.2 R45.2 R46.1 SERVO.4 U2.1 U2.9 U2.24 U2.36 U2.48 U3.15 U4.1 U4.6 U5.19 U5.20 | length 156.3
  Top Layer 1 2 w0.2: U4.6@79.25,73.375 78.875,73.375 78.602,73.648 78.495,73.648 77.539,74.604 77.539,76.146 78.593,77.2 79.075,77.2 U4.1@79.25,77.375 79.25,78.9 80.425,80.075 R33.1@80.475,80.075 R34.1@81.475,80.075 82.525,80.075 83.6,81.15 83.6,82.175 83.85,82.425 83.85,82.45 84,82.6 84.05,82.6 84.325,82.875 U2.9@85.969,82.875 ; v1(83.3,72.05) 85.947,72.05 87.852,70.144 87.852,68.348 89.325,66.875 R16.2@89.325,66.825 ; v2(84.4,90.925) 86.225,90.925 86.875,90.275 86.875,90.05 C18.1@87.025,89.9 ; C19.1@84.431,86.894 85.95,86.894 U2.1@85.969,86.875 ; C18.1@86.875,89.9 86.875,89.875 87.269,89.481 U2.48@87.269,88.175 ; v2(87.075,98.9) 91.159,98.9 93.294,101.035 93.294,101.46 R41.2@93.444,101.61 ; C16.1@92.775,78.45 93.75,78.45 97.352,74.848 98.177,74.848 98.7,74.325 C13.1@98.7,74.3 98.713,74.287 99.163,74.287 v2(99.175,74.275) 100.632,74.275 100.898,74.541 100.898,74.849 U3.15@100.924,74.875 ; U2.36@94.069,86.875 95.695,86.875 95.833,87.013 96.062,87.013 96.375,87.325 96.637,87.063 96.637,83.963 97.787,82.813 100.215,82.813 100.233,82.83 102.545,82.83 103.3,82.075 R8.1@103.35,82.075 ; j9.1@94.85,90.9 96.325,89.425 v2(96.325,87.925) 96.389,87.861 C17.1@96.389,87.562
  Top Layer 1 2 w0.3: SERVO.4@74.35,86.095 74.57,86.315 74.57,87.307 75.788,88.525 75.788,92.891 76.6,93.703 78.452,93.703 78.628,93.527 78.628,93.212 78.677,93.162 78.677,92.573 80.622,90.628 82.728,90.628 84.4,92.3 R42.1@84.45,92.3 ; C19.1@84.431,86.894 84.406,86.894 83.382,87.918 83.132,87.918 83.132,89.457 84.343,90.668 84.343,90.868 v2(84.4,90.925) 84.4,91.006 84.475,91.081 84.475,92.2 84.45,92.225 R42.1@84.45,92.3 ; v2(85.35,93.825) 85.325,93.8 v2(85.325,93.15) 85.325,93.125 84.5,92.3 R42.1@84.45,92.3 ; U2.9@85.969,82.875 86.859,82.875 88.327,84.343 88.327,85.407 86.859,86.875 U2.1@85.969,86.875 ; U2.24@92.769,80.075 92.769,78.456 C16.1@92.775,78.45
  POWER w0.2: v1(79.725,73.025) 80.063,72.687 80.087,72.687 80.8,71.975 81.9,71.975 R36.2@82.425,72.5 ; U5.19@81.155,84.125 81.127,84.154 81.127,85.223 C25.1@81.025,85.325 C25.1@81.025,85.325 C24.1@82.062,85.327 ; U5.20@81.806,84.125 81.806,85.07 C24.1@82.062,85.327 ; C24.1@82.089,85.329 82.087,85.327 C24.1@82.062,85.327 ; R36.2@82.425,72.55 R36.2@82.425,72.5 ; v1(83.3,72.05) 83.283,72.067 82.858,72.067 R36.2@82.425,72.5 ; IC1.5@93.075,89.24 94.985,89.24 C21.1@95.2,89.025 96.3,87.925 v2(96.325,87.925)
  POWER w0.3: C24.1@82.089,85.329 82.114,85.329 83.075,86.29 v2(83.075,87.975) ; v2(84.4,90.925) 84.457,90.868 84.67,90.868 84.712,90.825 88.325,90.825 89.7,89.45 89.7,86.275 91.141,84.834 94.05,84.834 94.399,85.183 94.399,85.599 96.295,87.495 96.295,87.895 v2(96.325,87.925) 96.406,87.925 97.05,87.281 97.05,86.3 96.6,85.85 96.6,82.867 97.025,82.442 97.025,78.75 99.175,76.6 v2(99.175,74.275) ; 86.613,95.812 86.725,95.7
  POWER w0.5: 86.613,95.812 86.5,95.925 IC3.2@86.5,99.05 86.65,98.9 v2(87.075,98.9)
  other v1: 78.479,73.152 77.9,76.275
+5V: 1.1 C2.1 C20.1 C23.1 ENDSTOP.1 IC1.3 IC2.20 IC3.3 J6.4 R4.2 R48.2 RGB_LED.1 SERVO.2 USB1.A4B9 USB1.B4A9 | length 58.8
  Top Layer 1 2 w0.2: v2(92.825,98.575) 92.902,98.652 93.052,98.652 R48.2@93.363,98.962 ; R48.2@93.35,98.975 R48.2@93.363,98.962 ; R48.2@93.4,99.05 93.4,99 R48.2@93.363,98.962
  Top Layer 1 2 w0.5: J6.4@79.625,93.625 80.825,94.825 84.082,94.825 84.375,95.118 84.375,96.052 84.475,96.152 84.475,96.897 85.378,97.8 88.425,97.8 89.275,96.95 89.275,96.153 USB1.A4B9@89.325,96.103
  POWER w0.2: 78.05,88.925 78.3,88.675 84.761,88.675 C20.1@85.434,88.002 85.466,87.97 IC1.3@87.53,87.97 ; RGB_LED.1@84.9,69.75 86.25,71.1 90.125,71.1 94,74.975 C23.1@94,76.425 93.987,76.412 92.212,76.412 IC2.20@92.2,76.4 ; C2.1@88.67,101.825 88.008,102.487 88.008,103.208 88.125,103.325 89.887,103.325 89.905,103.343 105.633,103.343 106.075,102.9 R4.2@106.075,102.85
  other v2: 73.475,95.325 75.075,95.325 75.95,95.325 74.275,95.35 88.825,98 88.125,98.05 88.325,100.5 89.4,100.55 88.525,101.725
A+: J1.2 U3.24
A-: J1.1 U3.21
B+: J1.3 U3.26
B-: J1.4 U3.1
BOOT0: j9.2 R49.1 U2.44 | length 5.9
  Top Layer 1 2 w0.2: U2.44@89.269,88.175 89.269,89.686 90.527,90.944 90.794,90.944 R49.1@91.075,91.225 91.356,90.944 92.806,90.944 j9.2@92.85,90.9
BOOT1: PROBE.3 U2.20 | length 17.3
  Top Layer 1 2 w0.2: v1(88.873,82.075) 89.675,82.075 90.75,81 90.75,80.094 U2.20@90.769,80.075
  Bottom Layer w0.2: PROBE.3@76.89,86.095 77.1,85.885 77.1,85.15 80.175,82.075 v1(88.873,82.075)
"CAN RX": IC1.4 U2.45 | length 2.7
  Top Layer 1 2 w0.2: v1(88.725,89.55) 88.75,89.525 88.75,88.194 U2.45@88.769,88.175
  POWER w0.2: IC1.4@87.53,89.24 88.362,89.24 88.672,89.55 v1(88.725,89.55)
"CAN TX": IC1.1 U2.46 | length 4.1
  Top Layer 1 2 w0.2: U2.46@88.269,88.175 88.269,86.134 88.411,85.992 88.453,85.992 88.721,85.725 v1(88.775,85.725)
  POWER w0.2: IC1.1@87.53,85.43 88.362,85.43 88.619,85.687 88.737,85.687 v1(88.775,85.725)
CAN_H: IC1.7 j3.1 MAX-2*2P.1 | length 21.8
  Top Layer 1 2 w0.2: j3.1@94.85,94.9 94.9,94.95 97.944,94.95 MAX-2*2P.1@102.829,90.065
  POWER w0.2: IC1.7@93.075,86.7 92.348,86.7 91.298,87.75 91.298,92.898 92.025,93.625 92.235,93.625 92.563,93.953 93.903,93.953 j3.1@94.85,94.9
CAN_L: IC1.6 j4.2 MAX-2*2P.2 | length 13.4
  Top Layer 1 2 w0.2: j4.2@94.85,92.9 95.794,92.9 MAX-2*2P.2@98.629,90.065
  POWER w0.2: IC1.6@93.075,87.97 91.88,87.97 91.65,88.2 91.65,91.25 92.35,91.95 93.9,91.95 j4.2@94.85,92.9
DIAG0: U2.25 U3.11 | length 8.8
  Top Layer 1 2 w0.2: U2.25@94.069,81.375 95.665,81.375 95.751,81.462 96.162,81.462 v1(96.2,81.5) ; v1(98.875,78.1) 98.85,78.075 98.85,77.85 99.31,77.39 99.91,77.39 U3.11@99.925,77.375
  Bottom Layer w0.2: v1(96.2,81.5) 97.225,81.5 98.875,79.85 v1(98.875,78.1)
DIR: U2.39 U3.19 | length 21.4
  Top Layer 1 2 w0.2: v1@91.625,86.55 91.769,86.694 U2.39@91.769,88.175 ; v1(95.525,83.175) 95.563,83.213 96.162,83.213 97.4,81.975 97.4,80.05 97.7,79.75 v1(97.75,79.75) ; v1(102.05,74.025) 102.8,74.025 102.925,74.15 U3.19@102.925,74.875
  Bottom Layer w0.2: v1(91.65,86.525) 91.612,86.487 91.612,85.768 92.225,85.155 93.545,85.155 v1(95.525,83.175) ; v1(97.75,79.75) 97.75,78.325 v1(102.05,74.025)
EN: R8.2 U2.38 U3.2 | length 16.9
  Top Layer 1 2 w0.2: v1(92.175,86.075) 92.175,86.129 92.269,86.223 U2.38@92.269,88.175 ; v1(96.075,83.725) 96.129,83.725 96.288,83.566 96.308,83.566 97.548,82.325 101.293,82.325 101.446,82.478 102.205,82.478 102.778,81.905 102.778,81.598 103.3,81.075 R8.2@103.35,81.075 103.426,80.999 U3.2@103.426,79.875
  Bottom Layer w0.2: v1(92.175,86.075) 92.743,85.507 93.691,85.507 95.473,83.725 v1(96.075,83.725)